# Altium PCB PCB1.PcbDoc
Units mm, origin at the board's own origin, x right, y up, seen from the top; angles counter-clockwise.
Board outline 44 x 36 mm, 2 copper layers (Top Layer, Bottom Layer); 49 components, 26 nets, 137 pads, 282 vias.
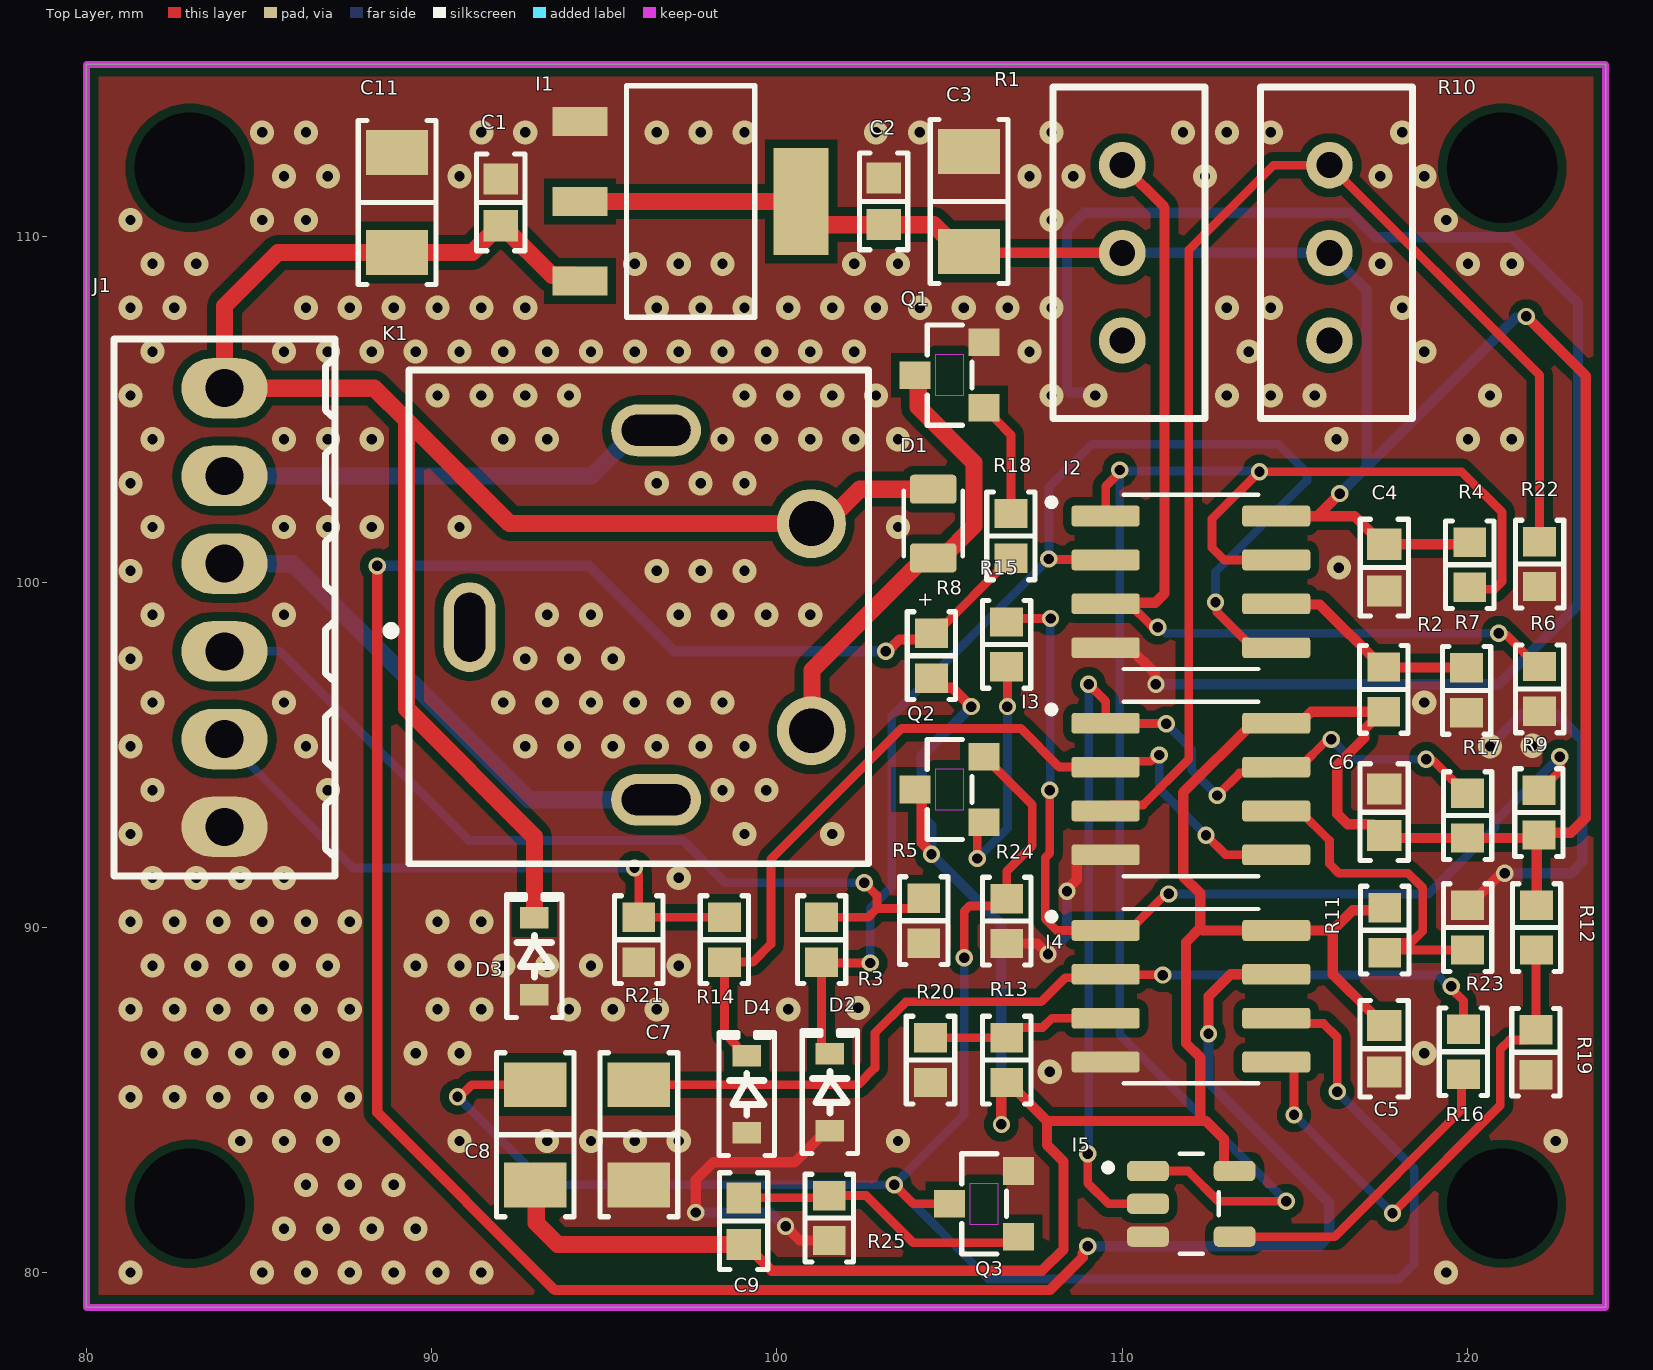
[diagram p0: Top Layer view]
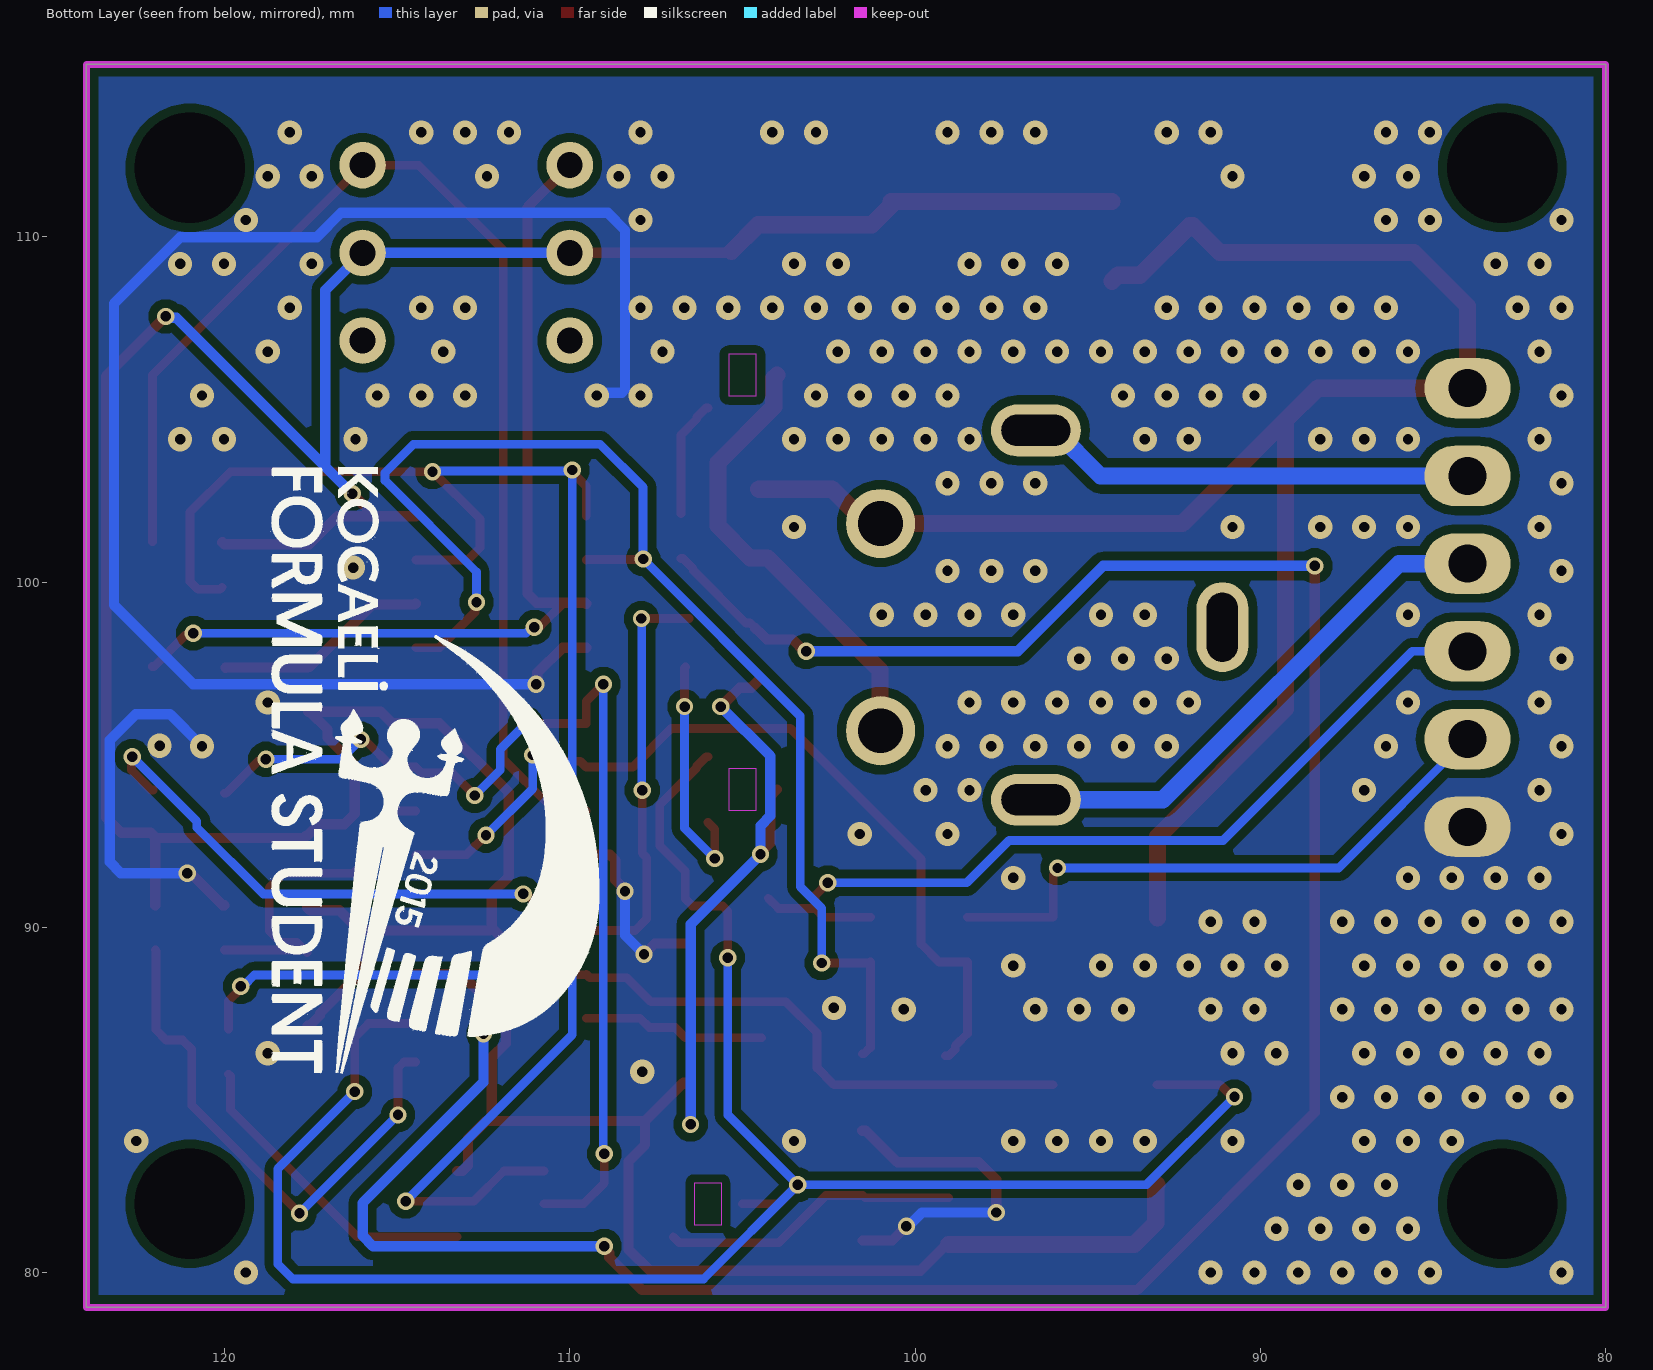
[diagram p1: Bottom Layer view, seen from below]
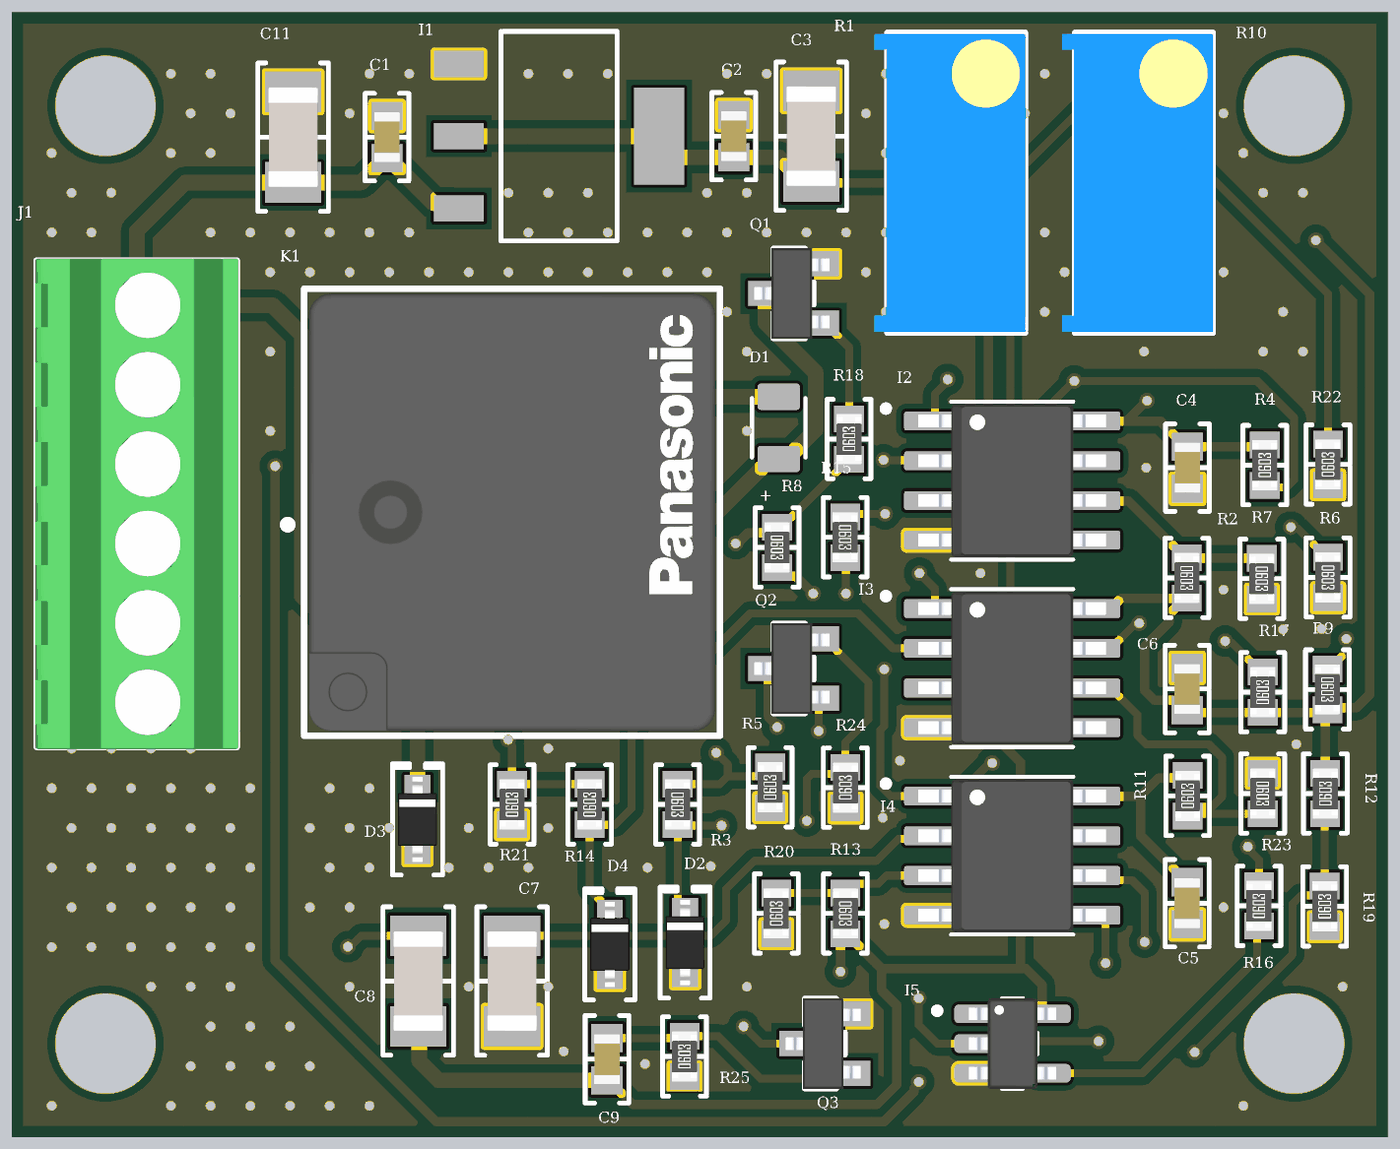
[diagram p2: 3D render of the assembled board from above, using the file's embedded part models]

## Layer stack, top to bottom
Top Solder: solder mask 0.0102, Solder Resist, Dk 3.5
Top Layer: signal copper 0.0356
Dielectric 1: dielectric 0.32, FR-4, Dk 4.8
Bottom Layer: signal copper 0.0356
Bottom Solder: solder mask 0.0102, Solder Resist, Dk 3.5

## Board outline
80,79 124,79 124,115 80,115

## Design rules (kind name [scope] priority, off if disabled: settings)
Clearance [All] p1: gap=0.254 ignorepadtopadclearanceinfootprint=FALSE except(0: Arc-Hole Track-Hole SMDPad-Hole THPad-Hole Via-Hole Fill-Hole Poly-Hole Region-Hole Text-Hole)
HoleSize [All] p1: absolutevalues=TRUE maxlimit=5 minlimit=0.025 maxpercent=80.000 minpercent=20.000
PolygonConnect [All] p1: connectstyle=Direct reliefconductorwidth=0.254 reliefentries=4 polygonreliefangle="90 Angle" airgapwidth=0.254
RoutingVias [All] p1: holewidth=0.711 width=0.7 viastyle="Through Hole" minholewidth=0.3 minwidth=0.5 maxholewidth=0.3 maxwidth=3
SolderMaskExpansion [All] p1: expansion=0.102 istentingtop=FALSE
Width [All] p1: maxlimit=2 minlimit=0.254 preferedwidth=0.5
29 further rules are at their usual default settings.

## Components (designator, comment, footprint, x,y, rotation, side; value= is the part's Value field where it differs from the comment)
C1 "0.1 µF" "CAP 0603_1608" 92,111 r270 top
C2 "0.1 µF" "CAP 0603_1608" 103.088,111.031 r270 top
C3 "10 µF" "CAP 1206_3216 - 0.8MM" 105.566,111.031 r270 top
C4 "0.1 µF" "CAP 0603_1608" 117.593,100.426 r270 top
C5 "0.1 µF" "CAP 0603_1608" 117.583,86.489 r270 top
C6 "0.1 µF" "CAP 0603_1608" 117.583,93.343 r90 top
C7 "10 µF" "CAP 1206_3216 - 0.8MM" 96,84 r90 top
C8 "10 µF" "CAP 1206_3216 - 0.8MM" 93,84 r270 top
C9 "0.1 µF" "CAP 0603_1608" 99.034,81.499 r90 top
C11 "10 µF" "CAP 1206_3216 - 0.8MM" 89,111 r270 top
D1 "MCL4148" MC4148 104.525,101.7 r270 top
D2 "DF2B18FU,H3F" SOD323 101.532,85.232 r90 top
D3 "DF2B18FU,H3F" SOD323 92.976,89.172 r90 top
D4 "DF2B18FU,H3F" SOD323 99.125,85.175 r90 top
I1 "LM1117MPX" LM1117 97.499,111.031 r0 top
I2 "LM393AD" PCBComponent_1 112,100 r0 top
I3 "LM393AD" PCBComponent_1 112,94 r0 top
I4 "LM393AD" PCBComponent_1 112,88 r0 top
I5 "SN74AHC1G02DBVR" "PCBComponent_1 - duplicate" 112,82 r0 top
J1 "282834-6" "TE 282834-6" 84,99.27 r270 top
K1 "CP1-12V" Panasonic_0_MFG 96,99 r90 top
Q1 "BSS138" BSS138 105,106 r90 top
Q2 "Si2309CDS" BSS138 105,94 r90 top
Q3 "BSS138" BSS138 106,82 r90 top
R1 "=Value" "BOURNS TRIMPOT 3296W" 110,109.54 r90 top
R2 "100 kOhms" "RES 0603_1608" 117.574,96.898 r270 top
R3 "10 kOhms" "RES 0603_1608" 101.294,89.65 r270 top
R4 "10 kOhms" "RES 0603_1608" 120.064,100.507 r90 top
R5 "100 kOhms" "RES 0603_1608" 104.25,90.2 r90 top
R6 "10 kOhms" "RES 0603_1608" 122.088,96.913 r270 top
R7 "10 kOhms" "RES 0603_1608" 119.97,96.87 r270 top
R8 "10 kOhms" "RES 0603_1608" 104.474,97.875 r270 top
R9 "10 kOhms" "RES 0603_1608" 122.069,93.331 r270 top
R10 "=Value" "BOURNS TRIMPOT 3296W" 116,109.54 r90 top
R11 "100 kOhms" "RES 0603_1608" 117.6,89.925 r90 top
R12 "39 kOhms" "RES 0603_1608" 122,90 r90 top
R13 "39 kOhms" "RES 0603_1608" 106.657,86.162 r270 top
R14 "10 kOhms" "RES 0603_1608" 98.48,89.65 r90 top
R15 "100 Ohms" "RES 0603_1608" 106.65,98.2 r270 top
R16 "39 kOhms" "RES 0603_1608" 119.881,86.406 r90 top
R17 "10 kOhms" "RES 0603_1608" 120,93.243 r90 top
R18 "100 Ohms" "RES 0603_1608" 106.775,101.342 r90 top
R19 "10 kOhms" "RES 0603_1608" 121.981,86.389 r90 top
R20 "100 kOhms" "RES 0603_1608" 104.447,86.162 r90 top
R21 "100 kOhms" "RES 0603_1608" 96,89.65 r90 top
R22 "10 kOhms" "RES 0603_1608" 122.088,100.526 r90 top
R23 "10 kOhms" "RES 0603_1608" 120,90 r270 top
R24 "560 kOhms" "RES 0603_1608" 106.657,90.189 r90 top
R25 "560 kOhms" "RES 0603_1608" 101.515,81.588 r90 top

## Footprints (in the part's own frame and the unit in brackets; to place one, negate y for a bottom-side part, rotate by r counter-clockwise, add the part's x,y. Pads: shape width x height; smd on the part's side, far side on the other; paste and mask are expansions set on the pad)
"BOURNS TRIMPOT 3296W" [mm] "3296 - 3/8 ? Square Trimpot® Trimming Potentiometer"
  round 1.35 hole 0.75: 1(-2.54,0) 2(0,0) 3(2.54,0)
  silkscreen extent -4.8,-2.4 4.8,2, body extent -4.76,-2.41 4.76,2.41, height 11.56
BSS138 [mm]
  rect 0.8x0.9 smd: 1(-0.95,-1) 2(0.95,-1) 3(0,1)
  Keep-Out Layer region: 0.6,-0.4 -0.6,-0.4 -0.6,0.4 0.6,0.4
  silkscreen extent -1.45,-0.65 1.45,0.65, body extent -1.45,-1.14 1.45,1.26, height 1.15
"CAP 0603_1608" [mm] "Chip Capacitor, 2-Leads, Body 1.60x0.80mm, IPC Medium Density"
  rect 0.9x1 smd: 1(-0.675,0) 2(0.675,0)
  silkscreen extent -1.4,-0.7 1.4,0.7, body extent -0.8,-0.41 0.8,0.41, height 0.82
"CAP 1206_3216 - 0.8MM" [mm] "Chip Capacitor, 2-Leads, Body 3.25x1.60mm, IPC Medium Density"
  rect 1.3x1.8 smd: 1(-1.45,0) 2(1.45,0)
  silkscreen extent -2.37,-1.12 2.37,1.12, body extent -1.6,-0.8 1.6,0.8, height 0.8
LM1117 [mil]
  rect 63x33 smd: 1(-126,91) 2(-126,0) 3(-126,-91)
  rect 63x122 smd: 4(126,0)
  silkscreen extent -73,-132 73,132
MC4148 [mm]
  rrect25% 0.84x1.35 smd: A(0.995,0) C(-0.995,0)
  silkscreen extent -0.95,-0.85 0.95,0.85
Panasonic_0_MFG [mm]
  rrect100% 2.6x1.5 hole 0.9 slot 2 at 0 deg paste-1000 mask+0: 1(-0.3,4.9)
  rrect100% 1.5x2.6 hole 2 slot 0.9 at 0 deg paste-1000 mask+0: 2(-5.3,-0.5) 3(5.4,-0.5)
  round 2 hole 1.3 paste-1000 mask+0: 4(-3.3,-5) 5(2.7,-5)
  silkscreen extent -7.15,-6.65 7.15,7.3, body extent -7.25,-6.75 7.25,6.75, height 0.25
PCBComponent_1 [mm]
  rrect25% 1.97x0.6 smd: 1(-2.48,1.917) 2(-2.48,0.647) 3(-2.48,-0.623) 4(-2.48,-1.893) 5(2.46,-1.893) 6(2.46,-0.623) 7(2.46,0.647) 8(2.46,1.917)
  silkscreen extent -4.15,-2.51 1.94,2.54, body extent -3.01,-2.44 2.99,2.46, height 1.75
"PCBComponent_1 - duplicate" [mm]
  rrect50% 1.21x0.59 smd: 1(-1.255,0.95) 2(-1.255,0) 3(-1.255,-0.95) 4(1.255,-0.95) 5(1.255,0.95)
  silkscreen extent -2.51,-1.45 0.8,1.45, body extent -1.4,-1.45 1.4,1.45, height 1.45
"RES 0603_1608" [mm] "Chip Resistor, 2-Leads, Body 1.60x0.80mm, IPC Medium Density"
  rect 0.85x0.95 smd: 1(-0.65,0) 2(0.65,0)
  silkscreen extent -1.27,-0.7 1.27,0.7, body extent -0.8,-0.4 0.8,0.4, height 0.45
SOD323 [mm] "SOD, 2-Leads, Body 1.25x2.50mm, IPC Medium Density"
  rect 0.625x0.83 smd: 1(-1.112,0) 2(1.112,0)
  silkscreen extent -1.78,-0.8 1.78,0.8, body extent -1.36,-0.62 1.36,0.62, height 1.05
"TE 282834-6" [mm]
  oval 1.75x2.5 hole 1.1: 1(-6.35,0) 2(-3.81,0) 3(-1.27,0) 4(1.27,0) 5(3.81,0) 6(6.35,0)
  silkscreen extent -7.78,-3.2 7.78,3.2, body extent -7.85,-3.25 7.85,3.25, height 10

## Part data
C1 C2 C4 C5 C6 C9: library part 0603B104M160CT, "CAP CER 0.1UF 16V X7R 0603", Part Number=0603B104M160CT
C3 C7 C8 C11: library part C1206C106M4RAC7800, "CAP CER 10UF 16V X7R 1206", Part Number=C1206C106M4RAC7800
D2 D3 D4: "TVS DIODE 12VWM 33VC USC", Part Number=DF2B18FU,H3F
J1: "TERM BLK 6P SIDE ENT 2.54MM PCB", Part Number=282834-6
K1: "Relays 12VDC 225Ohm 20(NO)/10(NC)A SPDT(14mm 13mm 9.5mm) THT Automotive Relay Automotive", Ambient Temperature Range High=+85°C, Ambient Temperature Range Low=-40°C, Coil Current=53.3mA, Coil Power=640mW, Coil Resistance=225Ω, Coil Voltage=12V, Digikey Part Number=255-1939-ND, Manufacturer=Panasonic, Mouser Part Number=769-CP1-12V, Package=0, Temperature=to, Automotive=No, Category=Relay, Coil Type=Non-Latching, ComponentLink1Description=Upverter, ComponentLink1URL=https://upverter.com/part/id/f0cb69e971a210b5/, componentlink2description=Datasheet, componentlink2url=http://datasheet.octopart.com/CP1-12V-Panasonic-datasheet-10206954.pdf, Datasheet Path=datasheets/Relay_Panasonic_CP1-12V_eec.pdf, Device Class L1=Electromechanical, Device Class L2=Relays, Device Class L3="Power Relays", Digikey Description="RELAY AUTOMOTIVE SPDT 20A 12V", Height=9.8mm, helpURL=https://upverter.com/part/id/f0cb69e971a210b5/, Lead Free=Yes, Mouser Description="Relays 12VDC 225Ohm 20(NO)/10(NC)A SPDT(14mm 13mm 9.5mm) THT Automotive Relay Automotive", Number Of Contacts=1, Part Number=CP1-12V, RoHS=TRUE, Standoff Height=0.3mm, Supplier 1=Digi-Key, Supplier 2=Mouser, Supplier Part Number 1=255-1939-ND, Supplier Part Number 2=769-CP1-12V, Symbol Hash=fe78fdfa570af3e722bc44d6543b65f3de2fc8a39f1146d236955811f6049f9c, Throw Configuration=SPDT
R1 R10: library part 3296W-1-203A, "TRIMMER 20K OHM 0.5W PC PIN TOP", Part Number=3296W-1-203A
R2 R5 R11 R20 R21: library part AC0603FR-10100KL, "RES 100K OHM 1% 1/10W 0603", Part Number=AC0603FR-10100KL
R3 R4 R6 R7 R8 R9 R14 R17 R19 R22 R23: library part SG73P1JTTD103G, "RES 10K OHM 2% 1/3W 0603", Part Number=SG73P1JTTD103G
R12 R13 R16: library part ERJ-H3EF3902V, "RES 39K OHM 1% 1/8W 0603", Part Number=ERJ-H3EF3902V
R15 R18: library part RK73B1JRTTD101J, "RES 100 OHM 5% 1/8W 0603", Part Number=RK73B1JRTTD101J
R24 R25: library part RCS0603560KFKEA, "RES SMD 560K OHM 1% 1/4W 0603", Part Number=RCS0603560KFKEA

## Free pads (board coordinates)
  round 0 hole 3.2: 2(83,82) 2(83,112) 2(121,82) 2(121,112)

## Via types
v1: diameter 0.7, hole 0.3, Top Layer to Bottom Layer, tented both sides, 235 vias
v2: diameter 0.5, hole 0.3, Top Layer to Bottom Layer, tented both sides, 47 vias

## Nets (pads, with @x,y where several pads share a name; then routed paths per layer and width w, separated by ;. In a path a pad name is that pad's centre, name@x,y a point inside that pad or via, vN(x,y) a via of type N, cw(c..) or ccw(c..) an arc to the next point about the centre after c; other vN are vias at no path point)
+12: C1.2 C11.2 D1.C D3.2 I1.3 J1.1 K1.5 | length 52.8
  Top Layer w0.5: D3.2 92.976,92.635 89.275,96.336 89.275,104.685 ; I1.3 94.13,108.888 93.487,108.888 92.05,110.325 C1.2 91.95,110.325 91.175,109.55 C11.2 85.55,109.55 84,108 J1.1 88.34,105.62 89.275,104.685 ; D1.C 102.401,102.695 101.406,101.7 K1.5 92.26,101.7 89.275,104.685
GND: C1.1 C2.1 C3.1 C4.2 C5.2 C6.2 C7.1 C11.1 D2.1 D3.1 D4.1 I1.1 I2.4 I3.4 I4.4 I5.3 J1.6 Q1.2 Q3.2 R5.1 R6.2 R7.2 R19.1 R20.1 R21.1 R22.1 R23.1 R24.1 R25.1 | length 71.2
  Top Layer w0.3: v2(97.65,81.75) 97.65,82.699 98.151,83.2 100.51,83.2 101.43,84.12 D2.1 ; v2(100.25,81.35) 100.662,80.938 R25.1 ; R24.1 107.536,89.539 v2(107.85,89.225) ; v2(108.4,91.05) 108.4,91.104 108.685,91.389 108.685,91.957 108.835,92.107 I3.4 ; I2.4 110.205,98.107 110.937,97.376 110.937,97.088 v2(110.975,97.05) ; R23.1 120.05,90.65 120.937,91.537 121.037,91.537 v2(121.075,91.575)
  Bottom Layer w0.3: v2(97.65,81.75) 99.796,81.75 100.196,81.35 v2(100.25,81.35) ; v2(107.85,89.225) 108.4,89.775 v2(108.4,91.05) ; v1(109.22,105.41) 109.143,105.487 108.499,105.487 108.4,105.586 108.4,110.2 108.9,110.7 116.625,110.7 117.329,109.996 121.275,109.996 123.2,108.071 123.2,99.35 120.9,97.05 v2(110.975,97.05) ; v1(120.65,95.25) 121.575,96.175 122.571,96.175 123.325,95.421 123.325,91.9 123,91.575 v2(121.075,91.575)
  other v1: 81.28,80.01 85.09,80.01 86.36,80.01 87.63,80.01 88.9,80.01 90.17,80.01 91.44,80.01 119.38,80.01 85.725,81.28 86.995,81.28 88.265,81.28 89.535,81.28 86.36,82.55 87.63,82.55 88.9,82.55 84.455,83.82 85.725,83.82 86.995,83.82 90.805,83.82 93.345,83.82 94.615,83.82 95.885,83.82 97.155,83.82 103.505,83.82 122.555,83.82 81.28,85.09 82.55,85.09 83.82,85.09 85.09,85.09 86.36,85.09 87.63,85.09 107.9,85.825 81.915,86.36 83.185,86.36 84.455,86.36 85.725,86.36 86.995,86.36 89.535,86.36 90.805,86.36 118.745,86.36 81.28,87.63 82.55,87.63 83.82,87.63 85.09,87.63 86.36,87.63 87.63,87.63 90.17,87.63 91.44,87.63 93.98,87.63 95.25,87.63 96.52,87.63 100.33,87.63 102.35,87.675 81.915,88.9 83.185,88.9 84.455,88.9 85.725,88.9 86.995,88.9 89.535,88.9 90.805,88.9 92.075,88.9 93.345,88.9 94.615,88.9 97.155,88.9 81.28,90.17 82.55,90.17 83.82,90.17 85.09,90.17 86.36,90.17 87.63,90.17 90.17,90.17 91.44,90.17 81.915,91.44 83.185,91.44 84.455,91.44 85.725,91.44 97.155,91.44 81.28,92.71 99.06,92.71 101.6,92.71 81.915,93.98 86.995,93.98 98.425,93.98 99.695,93.98 81.28,95.25 86.36,95.25 92.71,95.25 93.98,95.25 95.25,95.25 96.52,95.25 97.79,95.25 99.06,95.25 121.878,95.267 81.915,96.52 85.725,96.52 92.075,96.52 93.345,96.52 94.615,96.52 95.885,96.52 97.155,96.52 98.425,96.52 118.745,96.52 81.28,97.79 92.71,97.79 93.98,97.79 95.25,97.79 81.915,99.06 85.725,99.06 93.345,99.06 94.615,99.06 97.155,99.06 98.425,99.06 99.695,99.06 100.965,99.06 81.28,100.33 96.52,100.33 97.79,100.33 99.06,100.33 116.275,100.425 81.915,101.6 85.725,101.6 86.995,101.6 88.265,101.6 90.805,101.6 103.505,101.6 81.28,102.87 96.52,102.87 97.79,102.87 99.06,102.87 81.915,104.14 85.725,104.14 86.995,104.14 88.265,104.14 92.075,104.14 93.345,104.14 98.425,104.14 99.695,104.14 100.965,104.14 102.235,104.14 103.505,104.14 116.205,104.14 120.015,104.14 121.285,104.14 81.28,105.41 90.17,105.41 91.44,105.41 92.71,105.41 93.98,105.41 99.06,105.41 100.33,105.41 101.6,105.41 102.87,105.41 107.95,105.41 113.03,105.41 114.3,105.41 115.57,105.41 120.65,105.41 81.915,106.68 85.725,106.68 86.995,106.68 88.265,106.68 89.535,106.68 90.805,106.68 92.075,106.68 93.345,106.68 94.615,106.68 95.885,106.68 97.155,106.68 98.425,106.68 99.695,106.68 100.965,106.68 102.235,106.68 107.315,106.68 113.665,106.68 118.745,106.68 81.28,107.95 82.55,107.95 86.36,107.95 87.63,107.95 88.9,107.95 90.17,107.95 91.44,107.95 92.71,107.95 96.52,107.95 97.79,107.95 99.06,107.95 100.33,107.95 101.6,107.95 102.87,107.95 104.14,107.95 105.41,107.95 106.68,107.95 107.95,107.95 113.03,107.95 114.3,107.95 118.11,107.95 81.915,109.22 83.185,109.22 95.885,109.22 97.155,109.22 98.425,109.22 102.235,109.22 103.505,109.22 117.475,109.22 120.015,109.22 121.285,109.22 81.28,110.49 85.09,110.49 86.36,110.49 107.95,110.49 119.38,110.49 85.725,111.76 86.995,111.76 90.805,111.76 107.315,111.76 108.585,111.76 112.395,111.76 117.475,111.76 118.745,111.76 85.09,113.03 86.36,113.03 91.44,113.03 92.71,113.03 96.52,113.03 97.79,113.03 99.06,113.03 102.87,113.03 104.14,113.03 107.95,113.03 111.76,113.03 113.03,113.03 114.3,113.03 118.11,113.03
NetC7_2: C7.2 I4.2 R16.2 | length 27
  Top Layer w0.254: C7.2 102.35,85.45 102.836,85.936 102.836,86.946 103.74,87.85 107.65,87.85 108.348,88.548 109.42,88.548 I4.2 109.531,88.636 111.164,88.636 v2(111.175,88.625) ; v2(119.525,88.3) 119.525,88.233 119.881,87.877 R16.2
  Bottom Layer w0.254: v2(111.175,88.625) 119.133,88.625 119.458,88.3 v2(119.525,88.3)
NetC8_1: C8.1 I4.6 Q2.2 Q3.3 R24.2 | length 58.9
  Top Layer w0.254: v2(90.75,85.1) 90.817,85.1 91.167,85.45 C8.1 ; v2(103.4,82.55) 103.95,82 Q3.3 ; v2(105.425,89.125) 105.425,90.476 105.574,90.625 106.443,90.625 R24.2 106.657,91.632 107.392,92.367 107.392,93.558 106.323,94.627 106.323,94.677 106.05,94.95 Q2.2 ; I4.6 114.613,87.224 115.826,87.224 116.225,86.825 v2(116.225,85.25)
  Bottom Layer w0.254: v2(90.75,85.1) 93.3,82.55 v2(103.4,82.55) ; v2(105.425,89.125) 105.425,84.575 v2(103.4,82.55) ; v2(116.225,85.25) 118.456,83.019 118.456,80.256 118.025,79.825 106.125,79.825 v2(103.4,82.55)
NetC9_2: C9.2 Q3.1 R25.2 | length 8.6
  Top Layer w0.254: C9.2 101.45,82.174 R25.2 102.587,82.238 103.95,80.875 106.825,80.875 Q3.1
NetD1_A: D1.A K1.4 Q1.3 | length 13.3
  Top Layer w0.5: K1.4 101.015,95.715 101.015,97.45 104.27,100.705 D1.A 104.78,100.705 105.704,101.629 105.704,103.471 104.096,105.079 104.096,105.904 Q1.3
NetD2_2: D2.2 I2.2 I2.5 R3.2 | length 37.4
  Top Layer w0.254: D2.2 101.479,86.345 101.294,86.53 R3.2 101.319,88.975 v2(102.7,88.975) ; v2(107.875,100.675) 107.889,100.661 109.506,100.661 I2.2 ; v2(112.7,99.425) 112.747,99.378 112.747,99.135 113.775,98.107 I2.5
  Bottom Layer w0.254: v2(102.7,88.975) 102.7,90.558 103.325,91.183 103.325,96.125 v2(107.875,100.675) 107.875,102.75 109.125,104 114.525,104 115.35,103.175 115.35,102.95 112.7,100.3 v2(112.7,99.425)
NetD4_2: D4.2 I3.2 I3.5 R14.1 | length 25.6
  Top Layer w0.254: D4.2 99.023,86.288 98.837,86.473 98.837,86.576 98.48,86.933 R14.1 99.3,89 99.825,89.525 99.825,91.975 103.619,95.769 107.056,95.769 108.178,94.647 I3.2 109.693,94.82 110.829,94.82 111.008,95 v2(111.075,95) ; v2(112.425,92.675) 112.993,92.107 I3.5
  Bottom Layer w0.254: v2(111.075,95) 111.075,94.025 v2(112.425,92.675)
NetQ2_1: Q2.1 R15.2 | length 7.1
  Top Layer w0.254: v2(105.8,92) 105.8,92.85 Q2.1 ; R15.2 106.675,97.525 v2(106.675,96.4)
  Bottom Layer w0.254: v2(105.8,92) 106.675,92.875 v2(106.675,96.4)
NetR1_3: I2.3 R1.3 R6.1 | length 28.1
  Top Layer w0.254: I2.3 110.205,99.377 110.835,98.747 110.978,98.747 v2(111.025,98.7) ; v2(120.9,98.525) 120.947,98.478 121.122,98.478 122.038,97.563 R6.1
  Top Layer w0.3: I2.3 109.548,99.406 110.955,99.406 111.225,99.676 111.225,110.855 R1.3
  Bottom Layer w0.254: v2(111.025,98.7) 111.092,98.7 111.267,98.525 v2(120.9,98.525)
NetR2_1: I2.6 R2.1 R7.1 | length 6.3
  Top Layer w0.3: I2.6 114.481,99.356 115.716,99.356 117.524,97.548 R2.1 117.588,97.534 119.956,97.534 R7.1
NetR8_1: I4.7 R8.1 R18.1 | length 77.4
  Top Layer w0.254: R8.1@104.623,98.674 104.772,98.823 104.906,98.823 106.427,100.344 106.427,100.394 106.725,100.692 R18.1
  Top Layer w0.3: v2(88.425,100.475) 88.425,84.65 93.571,79.504 107.9,79.504 108.854,80.458 108.854,80.575 109,80.721 v2(109,80.775) ; v2(103.15,98) 103.204,98 103.549,98.345 104.294,98.345 R8.1 R8.1@104.623,98.674 ; v2(112.5,86.925) 112.5,88.01 113.137,88.647 I4.7
  Bottom Layer w0.3: v2(88.425,100.475) 94.55,100.475 97.025,98 v2(103.15,98) ; v2(109,80.775) 115.7,80.775 116,81.075 116,82.025 112.5,85.525 v2(112.5,86.925)
NetR9_1: I4.1 R9.1 R15.1 | length 28.6
  Top Layer w0.254: R15.1@106.547,98.953 106.55,98.95 v2(107.925,98.95) ; v2(107.9,93.975) 107.9,92.157 107.769,92.026 107.769,90.256 108.108,89.917 110.205,89.917 111.216,90.928 111.303,90.928 v2(111.35,90.975) ; R9.1 122.119,93.981 122.694,94.556 122.694,94.927 v2(122.671,94.95)
  Bottom Layer w0.254: v2(107.9,93.975) 107.912,93.987 107.912,98.938 v2(107.925,98.95) ; v2(111.35,90.975) 118.875,90.975 120.799,92.899 120.799,93.078 v2(122.671,94.95)
NetR10_3: I3.3 R10.3 R22.2 | length 36.3
  Top Layer w0.254: I3.3 109.693,93.55 110.6,93.55 111.925,94.875 111.925,109.625 114.38,112.08 R10.3 122.088,105.992 R22.2
NetR11_1: I3.6 R11.1 R23.2 | length 10.5
  Top Layer w0.254: I3.6 115.145,93.377 116,92.522 116,91.85 116.275,91.575 118.275,91.575 118.626,91.224 118.7,91.15 118.7,89.9 118.373,89.573 117.898,89.573 R11.1@117.675,89.35 ; R11.1 R11.1@117.675,89.35 ; R23.2 R11.1@117.675,89.35
NetR12_1: I4.5 R12.1 R19.2 | length 15.6
  Top Layer w0.254: I4.5 114.802,86.107 114.975,85.934 v2(114.975,84.575) ; v2(117.825,81.725) 120.95,84.85 120.95,86.475 121.216,86.741 121.683,86.741 R19.2 121.981,89.331 R12.1
  Bottom Layer w0.254: v2(114.975,84.575) v2(117.825,81.725)
NetR13_1: I4.3 R13.1 R20.2 | length 5.3
  Top Layer w0.254: R20.2 R13.1 106.955,87.11 107.7,87.11 107.967,87.377 I4.3
NetR16_1: I5.4 R16.1 | length 9.1
  Top Layer w0.254: I5.4 116.15,81.05 119.825,84.725 119.825,85.699 R16.1
OUT_2: Q1.1 R18.2 | length 3.4
  Top Layer w0.254: Q1.1 106.05,105.05 106.323,104.777 106.323,104.727 106.775,104.275 R18.2
SC_IN: J1.2 K1.3 | length 13
  Bottom Layer w0.5: J1.2 94.63,103.08 95.95,104.4 K1.3
SC_OUT: J1.3 K1.2 | length 15.3
  Bottom Layer w0.5: J1.3 85.985,100.54 92.825,93.7 K1.2
SENS_1: J1.4 R3.1 R5.2 | length 25.4
  Top Layer w0.254: R3.1 102.525,90.3 102.646,90.3 102.898,90.552 ; v2(102.525,91.3) 102.898,90.927 102.898,90.552 ; R5.2 103.952,90.552 102.898,90.552
  Bottom Layer w0.254: J1.4 85.6,98 91.075,92.525 97.275,92.525 98.5,91.3 v2(102.525,91.3)
SENS_1_OUT: I2.1 I2.7 I5.1 R4.1 | length 48.5
  Top Layer w0.254: I2.1 109.52,102.778 109.925,103.183 v2(109.925,103.25) ; I5.1 111.903,82.95 112.778,82.075 v2(114.75,82.075) ; I2.7 112.953,100.647 112.6,101 112.6,101.837 113.963,103.2 v2(113.975,103.2) 119.825,103.2 121,102.025 121,100.025 120.775,99.8 120.121,99.8 R4.1
  Bottom Layer w0.254: v2(113.975,103.2) 113.95,103.225 109.95,103.225 v2(109.925,103.25) 109.925,86.9 v2(114.75,82.075)
SENS_2: J1.5 R14.2 R21.2 | length 17.4
  Top Layer w0.254: v2(95.875,91.725) 95.875,91.658 96,91.533 R21.2 R14.2
  Bottom Layer w0.254: J1.5 87.735,91.725 v2(95.875,91.725)
SENS_2_OUT: I3.1 I3.7 I5.2 R17.2 | length 30.8
  Top Layer w0.254: v2(109,83.45) 109,82.6 109.6,82 I5.2 ; v2(109.025,97.05) 109.52,96.555 I3.1 109.529,95.909 111.266,95.909 v2(111.275,95.9) ; v2(112.75,93.825) 113.399,94.474 114.287,94.474 I3.7 115.145,94.647 115.901,95.403 116.003,95.403 v2(116.05,95.45) ; v2(118.8,94.875) 118.847,94.828 119.015,94.828 119.95,93.893 R17.2
  Bottom Layer w0.254: v2(109,83.45) 109.031,83.481 109.031,97.044 v2(109.025,97.05) ; v2(111.275,95.9) 112.012,95.163 112.012,94.563 v2(112.75,93.825) ; v2(116.05,95.45) 116.625,94.875 v2(118.8,94.875)
VCC: C2.2 C3.2 C4.1 C5.1 C6.1 C8.2 C9.1 I1.2 I1.4 I2.8 I3.8 I4.8 I5.5 Q2.3 R1.2 R2.2 R4.2 R8.2 R9.2 R10.2 R11.2 R12.2 R13.2 R17.1 | length 145.5
  Top Layer w0.3: C9.1 99.084,80.824 99.85,80.058 107.671,80.058 108.3,80.687 108.3,83.225 107.819,83.706 107.819,84.4 ; Q2.3 104.196,93.804 104.196,92.458 104.475,92.179 v2(104.475,92.125) ; R8.2 104.749,96.95 105.075,96.95 v2(105.625,96.4) ; C3.2@105.316,109.581 105.356,109.54 R1.2 ; v2(106.5,84.3) 106.5,85.355 R13.2 106.707,85.512 107.819,84.4 ; I5.5 113.111,82.95 112.945,83.116 112.945,83.88 112.425,84.4 112.261,84.4 ; I2.8 115.648,101.917 ; v2(116.3,102.569) 115.648,101.917 ; R2.2 R2.2@117.524,96.248 ; C5.1 117.533,87.164 117.233,87.464 117.233,87.514 116.094,88.653 116.094,89.917 ; R11.2 117.524,90.499 116.675,90.499 116.094,89.917 ; R4.2 120.009,101.101 C4.1 117.543,101.101 116.727,101.917 115.648,101.917 ; v2(121.7,107.7) 123.425,105.975 123.425,93.175 122.994,92.744 122.132,92.744 R9.2 R9.2@122,92.612 ; R12.2 R9.2@122,92.612 ; 107.819,84.4 112.261,84.4 ; 112.261,84.4 112.261,86.24 111.846,86.654 111.846,89.575 112.261,89.989 ; 112.261,89.989 112.333,89.917 I4.8 116.094,89.917 ; 112.261,89.989 112.261,90.989 111.771,91.479 111.771,93.913 113.775,95.917 115.145,95.917 115.475,96.248 R2.2@117.524,96.248 ; R2.2@117.524,96.248 117.016,95.74 117.016,95.491 116.225,94.7 116.225,93.3 116.534,92.991 117.26,92.991 C6.1 117.633,92.668 117.708,92.593 R17.1 121.981,92.593 R9.2@122,92.612
  Top Layer w0.5: C8.2 93.032,82.518 93.032,81.443 93.651,80.824 C9.1 ; I1.2 I1.4 100.7,110.906 101.25,110.356 C2.2 104.541,110.356 C3.2@105.316,109.581
  Bottom Layer w0.3: v2(105.625,96.4) 104.196,94.971 104.196,93.233 104.475,92.954 v2(104.475,92.125) 106.5,90.1 v2(106.5,84.3) ; R1.2 R10.2 117.079,108.461 117.079,103.348 ; v2(116.3,102.569) 117.079,103.348 ; v2(121.7,107.7) 121.662,107.662 121.393,107.662 117.079,103.348
pads on no net: K1.1 R1.1 R10.1

## Polygon pours and split planes (outlines as drawn)
GND on Top Layer "GND_L01_P001" (solid, remove dead copper, pour order 1): 80.1,114.925 123.8,114.925 123.8,79.125 123.75,79.075 80.1,79.075 80.1,114.95 80.05,115
GND on Bottom Layer "GND_L02_P000" (solid, remove dead copper, pour order 0): 80.1,114.925 123.8,114.925 123.8,79.125 123.75,79.075 80.1,79.075 80.1,114.95 80.05,115

## Keep-outs
Keep-Out Layer:
  the board outline again, w0.2

## Silkscreen, mask and mechanical layers (free items; w line width, h text height)
Bottom Overlay:
  drawing of 314 lines, arcs and shapes, not listed

## Text inside footprints (layer, text, board x,y; h text height)
D1: Top Overlay "+" at 103.975,99.725 h0.7 r270